# Altium PCB edison_breakout.PcbDoc (part 1 of 2)
Units mil, origin at the board's own origin, x right, y up, seen from the top; angles counter-clockwise.
Board outline 3250 x 2250 mil, 6 copper layers (Top Layer, Signal Layer 1, Signal Layer 3, Signal Layer 4, Signal Layer 2, Bottom Layer), stack 48.468 mil thick; 195 components, 178 nets, 869 pads, 172 vias.
Unrouted connection lines stored in the file: 453.
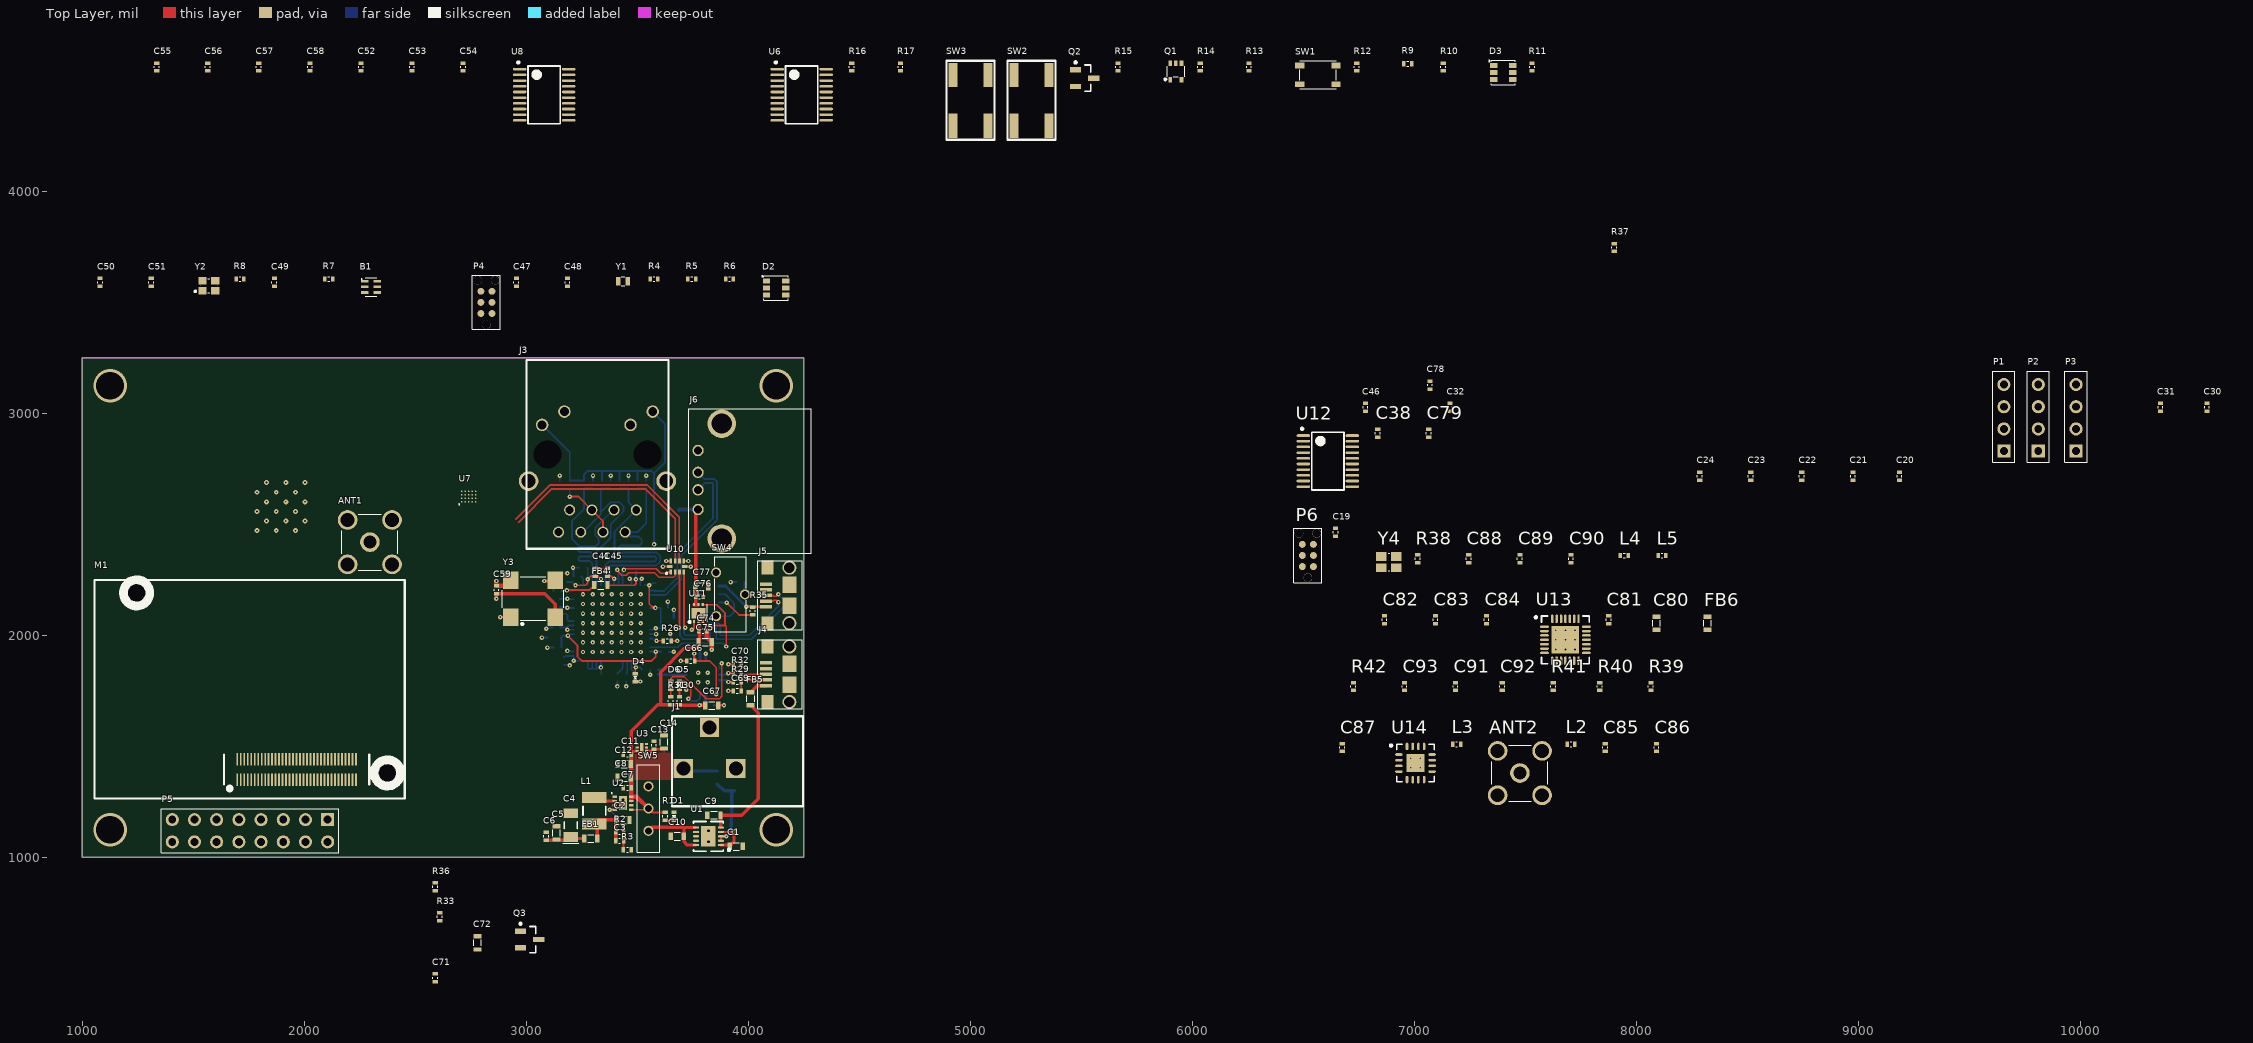
[diagram p0: Top Layer view]
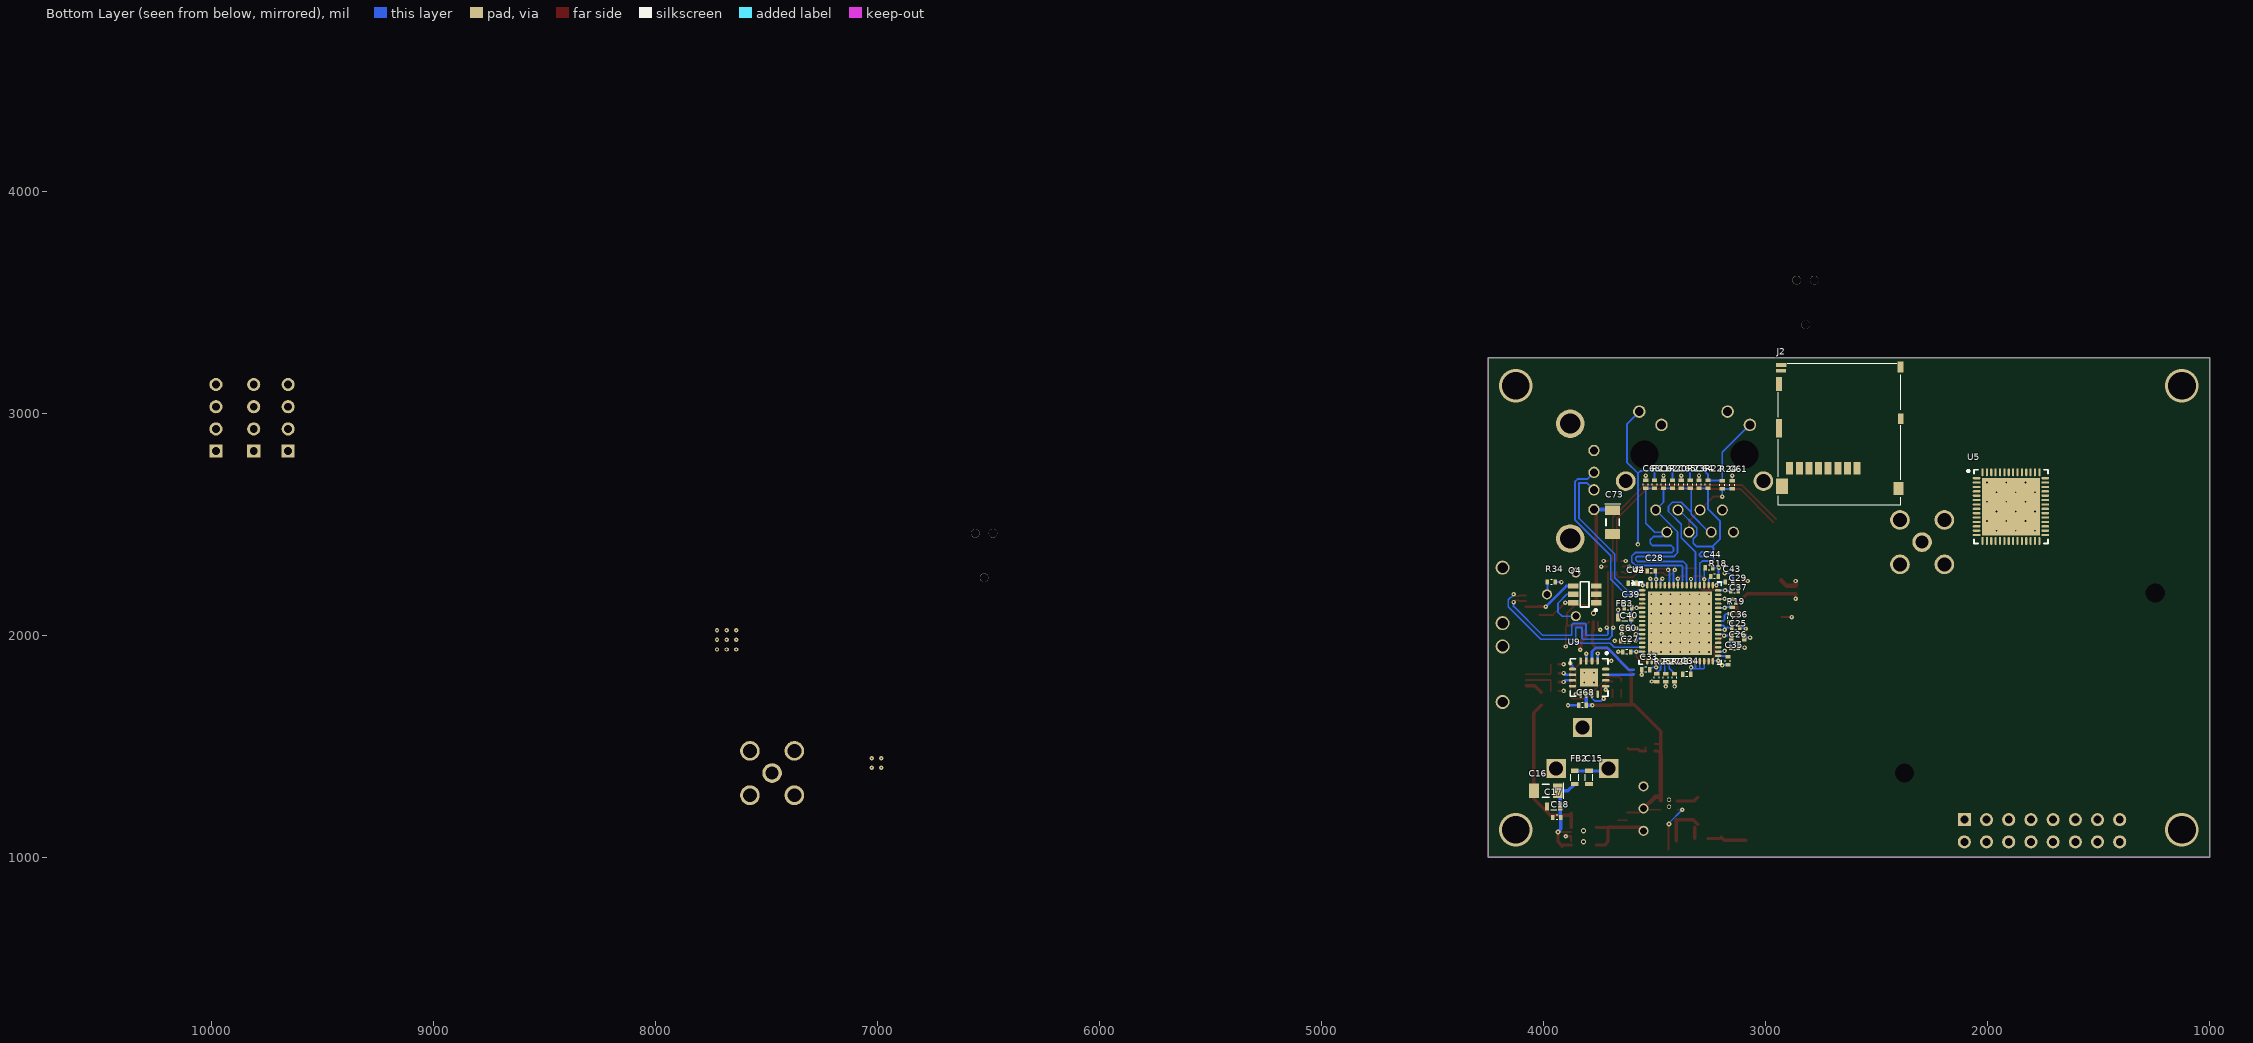
[diagram p1: Bottom Layer view, seen from below]
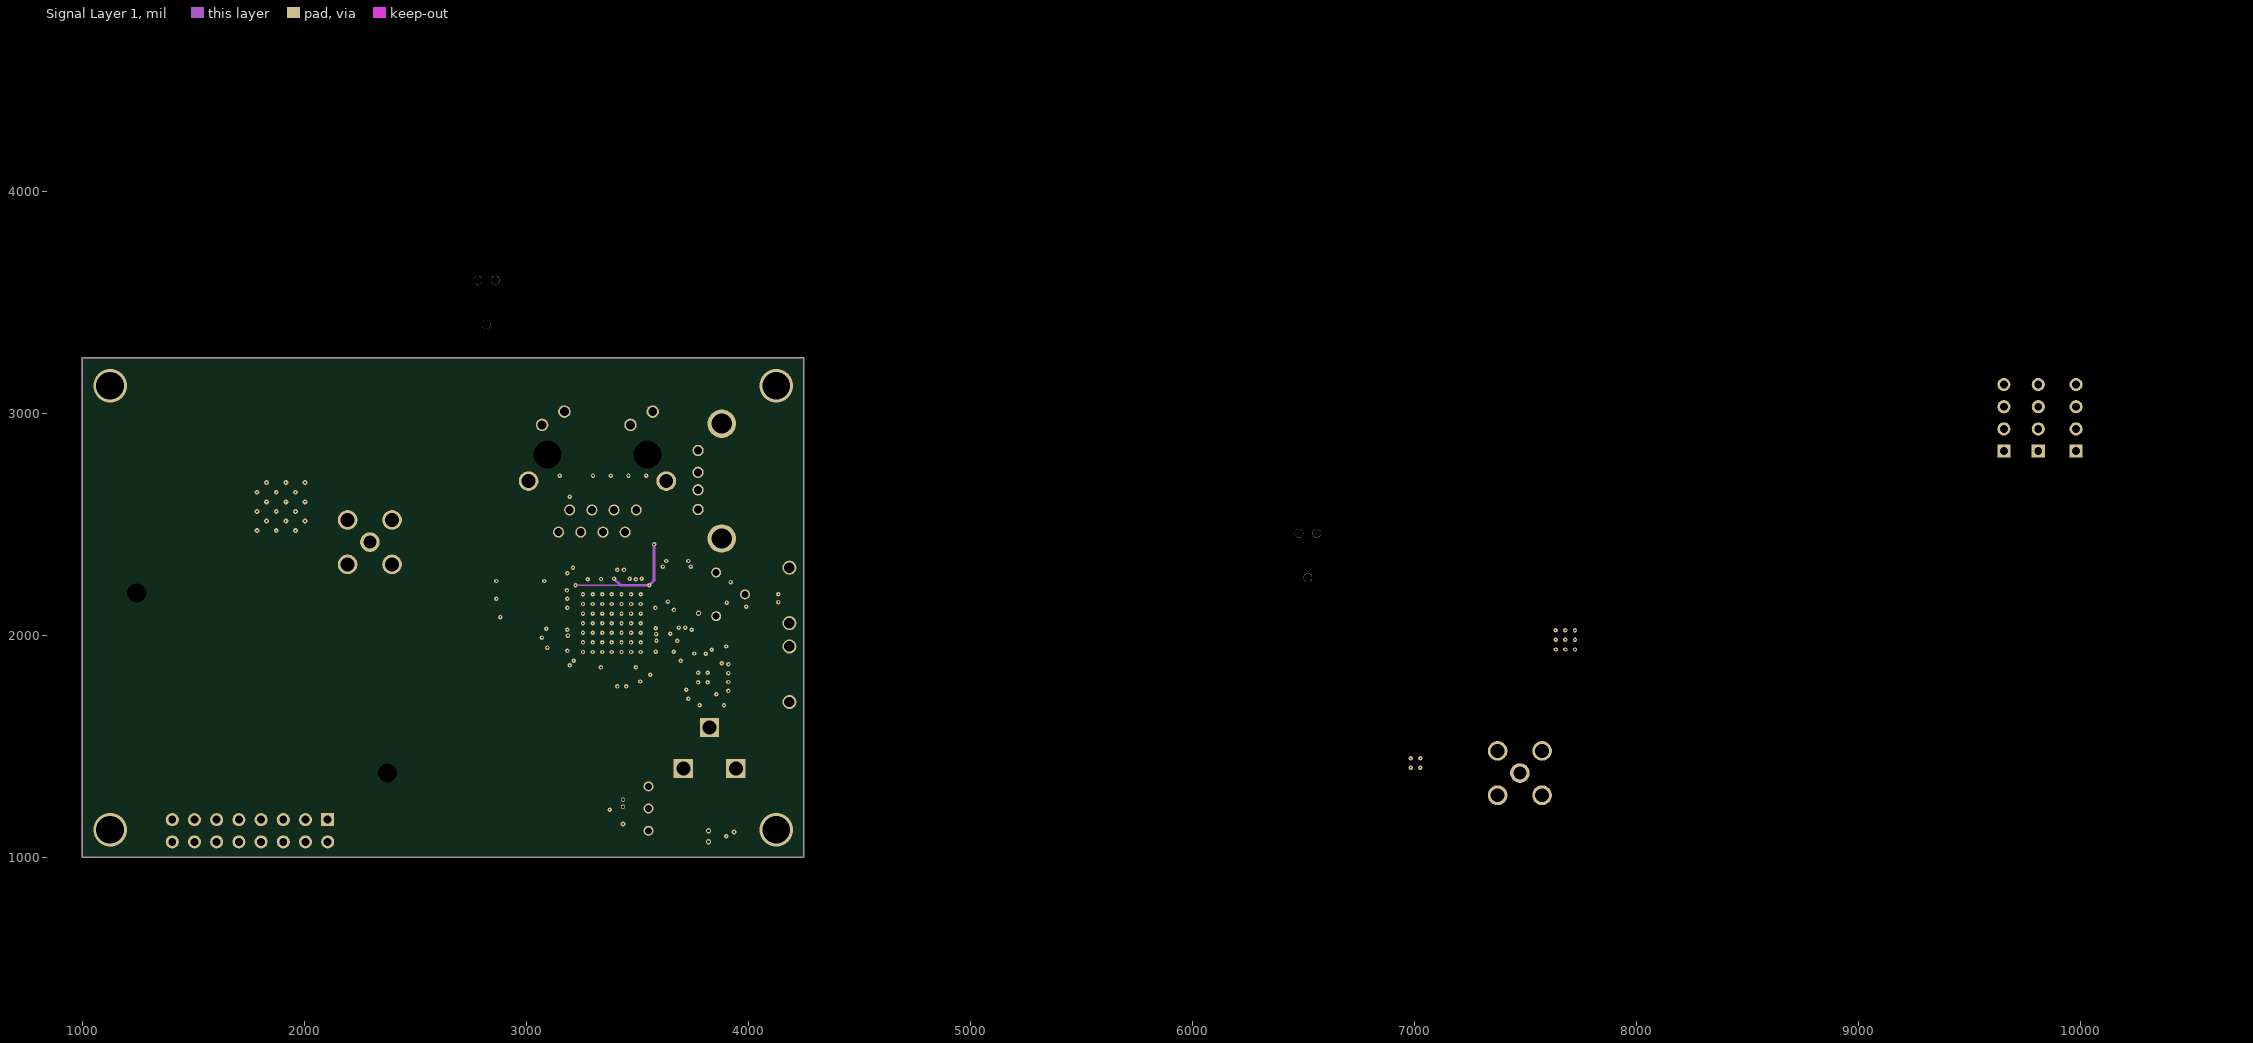
[diagram p2: Signal Layer 1]
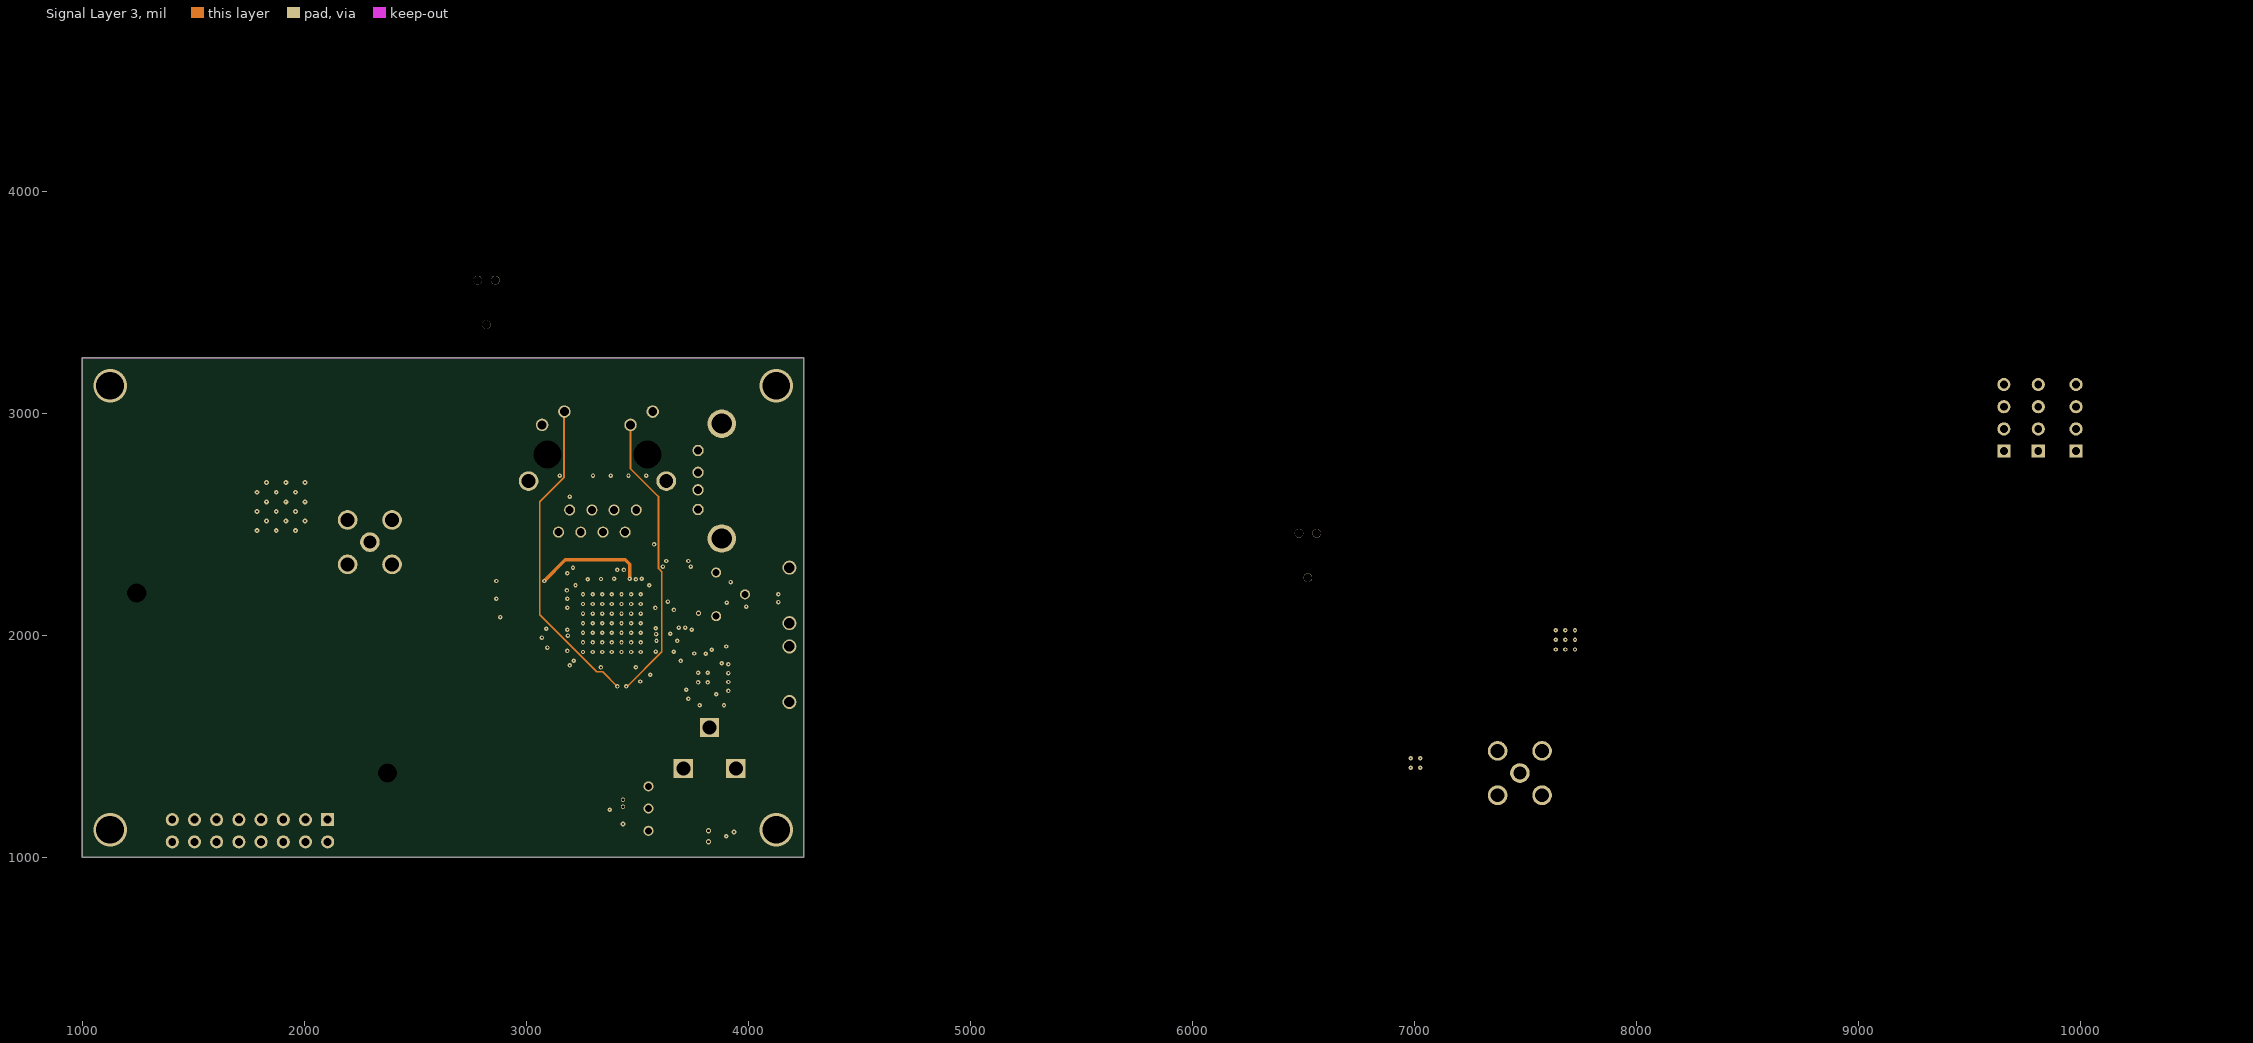
[diagram p3: Signal Layer 3]

## Layer stack, top to bottom
Top Solder: solder mask 0.4, Solder Resist, Dk 3.5
Top Layer: signal copper 1.4
Dielectric 1: core 10, FR-4, Dk 4.2
Signal Layer 1: signal copper 1.417
Dielectric 4: prepreg 5, Dk 4.2
Signal Layer 3: signal copper 1.417
Dielectric 5: core 10, Dk 4.2
Signal Layer 4: signal copper 1.417
Dielectric 3: prepreg 5, Dk 4.2
Signal Layer 2: signal copper 1.417
Dielectric 2: core 10, Dk 4.2
Bottom Layer: signal copper 1.4
Bottom Solder: solder mask 0.4, Solder Resist, Dk 3.5

## Board outline
1000,1000 1000,3250 4250,3250 4250,1000

## Design rules (kind name [scope] priority, off if disabled: settings)
Clearance "non plated holes" [InPadClass('NPHOLES')] p1: gap=10 // Sunstone Circuits Minimum Clearance Rule (MLB~4&6 Layer Designs)
Clearance "Clearance~Sunstone Circuits" [All] p2: gap=6 // Sunstone Circuits Minimum Clearance Rule (MLB~4&6 Layer Designs)
DiffPairsRouting [All] p1: maxlimit=10 minlimit=10 mostfreqgap=10 toplayer_minwidth=6 toplayer_maxwidth=15 toplayer_prefwidth=15 midlayer1_minwidth=6 midlayer1_maxwidth=15 midlayer1_prefwidth=15 midlayer2_minwidth=6 midlayer2_maxwidth=15 midlayer2_prefwidth=15 midlayer3_minwidth=15 midlayer3_maxwidth=15 midlayer3_prefwidth=15 midlayer4_minwidth=15 midlayer4_maxwidth=15 midlayer4_prefwidth=15 bottomlayer_minwidth=6 bottomlayer_maxwidth=15 bottomlayer_prefwidth=15 maxuncoupledlength=500
HoleSize "HoleSize~Sunstone Circuits" [All] p1: absolutevalues=TRUE maxlimit=251 minlimit=8 maxpercent=80.000 minpercent=20.000 // Sunstone Circuits Hole Size Rule (MLB~4&6 Layer Designs)
HoleSize Testpoint [All] p2: absolutevalues=TRUE maxlimit=100 minlimit=1 maxpercent=80.000 minpercent=20.000
HoleSize TestPointUsage [All] p3: absolutevalues=TRUE maxlimit=100 minlimit=1 maxpercent=80.000 minpercent=20.000
MatchedLengths [InNet(TX_N) and InNet(TX_P)] p1: tolerance=1000 checknetsindiffpair=TRUE checkdiffpairvsdiffpair=TRUE checkothers=TRUE
MinimumAnnularRing "MinimumAnnularRing~Sunstone Circuits" [All] p1 off: minimumring=7 // Sunstone Circuits Minimum Annular Ring (MLB~4&6 Layer Designs)
MinimumSolderMaskSliver [All] p1 off: minsoldermaskwidth=10
PlaneClearance "PlaneClearance~Sunstone Circuits" [All] p1: clearance=12 // Sunstone Circuits Power Plane Clearance Rule (MLB~4&6 Layer Designs)
PlaneConnect "PlaneConnect~Sunstone Circuits" [All] p1: planeconnectstyle=Relief reliefexpansion=10 reliefentries=4 reliefconductorwidth=8 reliefairgap=10 // Sunstone Circuits Power Plane Connect Rule (MLB~4&6 Layer Designs)
PolygonConnect "PolygonConnect~Sunstone Circuits" [All] p1: connectstyle=Relief reliefconductorwidth=8 reliefentries=4 polygonreliefangle="90 Angle" airgapwidth=10 // Sunstone Circuits Polygon Connect Style (MLB~4&6 Layer Designs)
RoomDefinition U_usb_uart [InComponentClass('U_usb_uart')] p1 off: confinementstyle=ConfineIn formatcopy=TRUE lockcomponents=FALSE outline 0,0 2000,0 2000,1000 0,1000
RoomDefinition U_usb_host_slave [InComponentClass('U_usb_host_slave')] p2 off: confinementstyle=ConfineIn formatcopy=TRUE lockcomponents=FALSE outline 0,0 2000,0 2000,1000 0,1000
RoomDefinition U_power [InComponentClass('U_power')] p3 off: confinementstyle=ConfineIn formatcopy=TRUE lockcomponents=FALSE outline 0,0 2000,0 2000,1000 0,1000
RoomDefinition U_ethernet [InComponentClass('U_ethernet')] p4 off: confinementstyle=ConfineIn formatcopy=TRUE lockcomponents=FALSE outline 0,0 2000,0 2000,1000 0,1000
RoomDefinition U_edison_misc [InComponentClass('U_edison_misc')] p5 off: confinementstyle=ConfineIn formatcopy=TRUE lockcomponents=FALSE outline 0,0 2000,0 2000,1000 0,1000
RoomDefinition U_edison_gpio [InComponentClass('U_edison_gpio')] p6 off: confinementstyle=ConfineIn formatcopy=TRUE lockcomponents=FALSE outline 0,0 2000,0 2000,1000 0,1000
RoomDefinition U_cc2538 [InComponentClass('U_cc2538')] p7 off: confinementstyle=ConfineIn formatcopy=TRUE lockcomponents=FALSE outline 0,0 2000,0 2000,1000 0,1000
RoomDefinition U_cc2520_cc2592 [InComponentClass('U_cc2520_cc2592')] p8 off: confinementstyle=ConfineIn formatcopy=TRUE lockcomponents=FALSE outline 0,0 2000,0 2000,1000 0,1000
RoutingVias "RoutingVias~Sunstone Circuits" [All] p1: holewidth=16 width=30 viastyle="Through Hole" minholewidth=6 minwidth=20 maxholewidth=20 maxwidth=40 // Sunstone Circuits Routing Vias Rule (MLB~4&6 Layer Designs)
ShortCircuit "ShortCircuit~Sunstone Circuits" [All] p1: allowed=FALSE // Sunstone Circuits Short Circuit Rule~Do Not Allow (MLB~4&6 Layer Designs)
SilkToSilkClearance [All] p1 off: silktosilkclearance=10
SilkToSolderMaskClearance [IsPad] p1 off: minsilkscreentomaskgap=10 clearancetoexposedcopper=TRUE
SolderMaskExpansion TentVias [isVia] p1: expansion=-20 // Sunstone Circuits Solder Mask Expansion Rule (MLB~4&6 Layer Designs)
SolderMaskExpansion "SolderMaskExpansion~Sunstone Circuits" [All] p2: expansion=3 // Sunstone Circuits Solder Mask Expansion Rule (MLB~4&6 Layer Designs)
ViasUnderSMD "ViasUnderSMD~Sunstone Circuits" [All] p1: allowed=FALSE // Sunstone Circuits Vias Under SMD~Do Not Allow (MLB~4&6 Layer Designs)
Width "Width~Sunstone Circuits" [All] p1: maxlimit=100 minlimit=6 preferedwidth=10 // Sunstone Circuits Minimum Width Rule (MLB~4&6 Layer Designs)
22 further rules are at their usual default settings.

## Classes and differential pairs
component class U_usb_uart: C66 C67 C68 C69 C70 D5 D6 FB5 J4 R29 R30 R31 R32 U9
component class U_usb_host_slave: C71 C72 C73 C74 C75 C76 C77 J5 J6 Q3 Q4 R33 R34 R35 R36 R37 SW4 U10 U11
component class U_power: C1 C2 C3 C4 C5 C6 C7 C8 C9 C10 C11 C12 C13 C14 C15 C16 C17 C18 C19 C20 C21 C22 C23 C24 C25 C26 C27 C28 C29 C30 C31 C32 C33 C34 C35 C36 C37 C39 C40 C41 C42 C43 C44 C45 C46 C78 D1 FB1 FB2 FB3 FB4 J1 L1 M1 P1 P2 P3 R1 R2 R3 SW5 U1 U2 U3 U5
component class U_ethernet: C59 C60 C61 C62 C63 C64 C65 D4 J3 R18 R19 R20 R21 R22 R23 R24 R25 R26 R27 R28 U4 Y3
component class U_edison_gpio: C38 C52 C53 C54 C55 C56 C57 C58 C79 D3 J2 P5 Q1 Q2 R9 R10 R12 R13 R14 R16 R17 SW2 SW3 U6 U7 U8 U12
component class U_cc2538: ANT1 B1 C47 C48 C49 C50 C51 D2 P4 P6 R4 R5 R6 R7 R8 Y1 Y2
component class U_cc2520_cc2592: ANT2 C80 C81 C82 C83 C84 C85 C86 C87 C88 C89 C90 C91 C92 C93 FB6 L2 L3 L4 L5 R38 R39 R40 R41 R42 U13 U14 Y4
component class U_edison_misc: R11 R15 SW1
differential pair USB_UPSTREAM: +USB_UPSTREAM_P -USB_UPSTREAM_N
differential pair USB_SLAVE: +USB_SLAVE_P -USB_SLAVE_N
differential pair USB_EDISON: +USB_EDISON_P -USB_EDISON_N
differential pair USB_DOWNSTREAM: +USB_DOWNSTREAM_P -USB_DOWNSTREAM_N
differential pair TX: +TX_P -TX_N
differential pair RX: +RX_P -RX_N
differential pair CC2538_RF: +CC2538_RF_P -CC2538_RF_N
differential pair CC2520_RF: +CC2520_RF_P -CC2520_RF_N

## Components (designator, comment, footprint, x,y, rotation, side; value= is the part's Value field where it differs from the comment)
ANT1 "5-1814832-1" 5-1814832-1 2295,2420 r0 top
ANT2 "5-1814832-1" 5-1814832-1 7475,1380 r0 top
B1 "2450BM15A0002E" 2450BM15A0002 2300,3570 r0 top
C1 "Ceramic capacitor" 0603 3945,1050 r0 top
C2 "Ceramic capacitor" 0603 3435,1169.25 r0 top
C3 "Ceramic capacitor" 0402 3420,1075 r0 top
C4 "Tantalum capacitor" "1206 - POLAR MARKING" 3200,1145 r90 top
C5 "Ceramic capacitor" 0603 3135,1110 r90 top
C6 "Ceramic capacitor" 0402 3090,1095 r90 top
C7 "Ceramic capacitor" 0402 3455,1314.25 r180 top
C8 "Ceramic capacitor" 0603 3440,1359.25 r180 top
C9 "Ceramic capacitor" 0603 3845,1190 r180 top
C10 "Ceramic capacitor" 0603 3680,1095 r180 top
C11 "Ceramic capacitor" 0402 3455,1465 r180 top
C12 "Ceramic capacitor" 0603 3440,1420 r180 top
C13 "Ceramic capacitor" 0402 3575,1505 r90 top
C14 "Ceramic capacitor" 0603 3620,1520 r90 top
C15 "Ceramic capacitor" 0603 3795,1360 r270 bottom
C16 "Tantalum capacitor" "1206 - POLAR MARKING" 3990,1300 r0 bottom
C17 "Ceramic capacitor" 0603 3955,1230 r0 bottom
C18 "Ceramic capacitor" 0402 3940,1180 r0 bottom
C19 "Ceramic capacitor" 0402 6645,2465 r90 top
C20 "Ceramic capacitor" 0402 9185,2717.28 r90 top
C21 "Ceramic capacitor" 0402 8975,2717.28 r90 top
C22 "Ceramic capacitor" 0402 8745,2717.28 r90 top
C23 "Ceramic capacitor" 0402 8515,2717.28 r90 top
C24 "Ceramic capacitor" 0402 8285,2717.28 r90 top
C25 "Ceramic capacitor" 0603 3125,1990 r180 bottom
C26 "Ceramic capacitor" 0402 3140,1945 r180 bottom
C27 "Ceramic capacitor" 0402 3625,1925 r0 bottom
C28 "Ceramic capacitor" 0402 3515,2290 r0 bottom
C29 "Ceramic capacitor" 0402 3140,2200 r180 bottom
C30 "Ceramic capacitor" 0402 10570,3027.28 r90 top
C31 "Ceramic capacitor" 0402 10360,3027.28 r90 top
C32 "Ceramic capacitor" 0402 7160,3027.28 r90 top
C33 "Ceramic capacitor" 0402 3540,1845 r0 bottom
C34 "Ceramic capacitor" 0402 3355,1825 r0 bottom
C35 "Ceramic capacitor" 0402 3170,1885 r270 bottom
C36 "Ceramic capacitor" 0402 3135,2035 r180 bottom
C37 "Ceramic capacitor" 0402 3150,2145 r270 bottom
C38 "Ceramic capacitor" 0402 6835,2910 r90 top
C39 "Ceramic capacitor" 0402 3620,2125 r0 bottom
C40 "Ceramic capacitor" 0402 3630,2030 r0 bottom
C41 "Ceramic capacitor" 0402 3310,2285 r90 top
C42 "Ceramic capacitor" 0402 3600,2235 r0 bottom
C43 "Ceramic capacitor" 0402 3165,2240 r180 bottom
C44 "Ceramic capacitor" 0402 3255,2305 r180 bottom
C45 "Ceramic capacitor" 0402 3365,2285 r90 top
C46 "Ceramic capacitor" 0402 6780,3027.28 r90 top
C47 "Ceramic capacitor" 0402 2955,3590 r90 top
C48 "Ceramic capacitor" 0402 3185,3590 r90 top
C49 "Ceramic capacitor" 0402 1865,3590 r90 top
C50 "Ceramic capacitor" 0402 1080,3590 r90 top
C51 "Ceramic capacitor" 0402 1310,3590 r90 top
C52 "Ceramic capacitor" 0402 2255,4560 r90 top
C53 "Ceramic capacitor" 0402 2485,4560 r90 top
C54 "Ceramic capacitor" 0402 2715,4560 r90 top
C55 "Ceramic capacitor" 0402 1335,4560 r90 top
C56 "Ceramic capacitor" 0402 1565,4560 r90 top
C57 "Ceramic capacitor" 0402 1795,4560 r90 top
C58 "Ceramic capacitor" 0402 2025,4560 r90 top
C59 "Ceramic capacitor" 0402 2865,2205 r270 top
C60 "Ceramic capacitor" 0402 3635,1975 r0 bottom
C61 "Ceramic capacitor" 0402 3150,2677.72 r90 bottom
C62 "Ceramic capacitor" 0402 3460,2680 r90 bottom
C63 "Ceramic capacitor" 0402 3540,2680 r90 bottom
C64 "Ceramic capacitor" 0402 3300,2680 r90 bottom
C65 "Ceramic capacitor" 0402 3380,2680 r90 bottom
C66 "Ceramic capacitor" 0402 3740,1885 r180 top
C67 "Ceramic capacitor" 0603 3835,1685 r0 top
C68 "Ceramic capacitor" 0402 3825,1685 r0 bottom
C69 "Ceramic capacitor" 0402 3950,1750 r180 top
C70 "Ceramic capacitor" 0402 3950,1870 r180 top
C71 "Ceramic capacitor" 0402 2590,457.28 r90 top
C72 "Ceramic capacitor" 0603 2780,615 r90 top
C73 "Tantalum capacitor" "1206 - POLAR MARKING" 3689,2510 r270 bottom
C74 "Ceramic capacitor" 0402 3795,2020 r0 top
C75 "Ceramic capacitor" 0603 3805,1970 r0 top
C76 "Ceramic capacitor" 0402 3780,2175 r0 top
C77 "Ceramic capacitor" 0603 3790,2220 r0 top
C78 "Ceramic capacitor" 0402 7070,3127.28 r90 top
C79 "Ceramic capacitor" 0402 7065,2910 r90 top
C80 "Ceramic capacitor" 0603 8090,2055 r90 top
C81 "Ceramic capacitor" 0402 7875,2070 r90 top
C82 "Ceramic capacitor" 0402 6865,2070 r90 top
C83 "Ceramic capacitor" 0402 7095,2070 r90 top
C84 "Ceramic capacitor" 0402 7325,2070 r90 top
C85 "Ceramic capacitor" 0402 7860,1495 r90 top
C86 "Ceramic capacitor" 0402 8090,1495 r90 top
C87 "Ceramic capacitor" 0402 6675,1495 r90 top
C88 "Ceramic capacitor" 0402 7245,2345 r90 top
C89 "Ceramic capacitor" 0402 7475,2345 r90 top
C90 "Ceramic capacitor" 0402 7705,2345 r90 top
C91 "Ceramic capacitor" 0402 7185,1770 r90 top
C92 "Ceramic capacitor" 0402 7395,1770 r90 top
C93 "Ceramic capacitor" 0402 6955,1770 r90 top
D1 "LED, Blue" "0402 - DIODE" 3665,1185 r90 top
D2 "CLY6D-FKC" PLCC6 4125,3565 r0 top
D3 "CLY6D-FKC" PLCC6 7400,4535 r0 top
D4 "LED, Orange" "0402 - DIODE" 3490,1810 r270 top
D5 "LED, Green" "0402 - DIODE" 3690,1775 r90 top
D6 "LED, Red" "0402 - DIODE" 3650,1775 r90 top
FB1 "Ferrite Bead" 0603 3290,1085 r0 top
FB2 "Ferrite Bead" 0603 3860,1360 r90 bottom
FB3 "Ferrite Bead" 0603 3635,2080 r0 bottom
FB4 "Ferrite Bead" 0603 3335.79,2226.26 r0 top
FB5 "Ferrite Bead" 0603 4010,1715 r90 top
FB6 "Ferrite Bead" 0603 8320,2055 r90 top
J1 "PJ-102AH" PJ-102AH 3825,1400 r270 top locked
J2 "2201778-1" 2201778-1 2740,2780 r180 bottom locked
J3 "J0011D01BNL" J0011D01BNL 3320,2815 r0 top locked
J4 "micro USB-B" "Micro USB-B" 4185,1825 r90 top locked
J5 "micro USB-B" "Micro USB-B" 4185,2180 r90 top locked
J6 "USB-A" 292303-2 3880,2695 r90 top locked
L1 "Chip inductor" 1210 3310,1210 r270 top
L2 "Chip inductor" 0402 7705,1510 r0 top
L3 "Chip inductor" 0402 7190,1510 r0 top
L4 "Chip inductor" 0402 7945,2360 r0 top
L5 "Chip inductor" 0402 8115,2360 r0 top
M1 "Intel Edison" "INTEL EDISON MATING" 1965,1395 r0 top
P1 "1 x 4 header" "1x4 header" 9655,2980 r90 top
P2 "1 x 4 header" "1x4 header" 9810,2980 r90 top
P3 "1 x 4 header" "1x4 header" 9980,2980 r90 top
P4 "TC2030" TC2030-IDC-NLFP 2820,3500 r90 top
P5 "2 x 8 header" "2x8 header" 1755,1120 r180 top
P6 "TC2030" TC2030-IDC-NLFP 6520,2360 r90 top
Q1 "DMN32D2LDF" SOT-353-5 5925,4540 r0 top
Q2 "Si2312CDS" SOT23-3 5515,4510 r0 top
Q3 "Si2312CDS" SOT23-3 3015,630 r0 top
Q4 "Si3865DDV" TSOT-23 3815,2185 r0 bottom
R1 "Chip resistor" 0402 3625,1185 r270 top
R2 "Chip resistor" 0402 3420,1115 r0 top
R3 "Chip resistor" 0402 3455,1035 r0 top
R4 "Chip resistor" 0402 3575,3605 r0 top
R5 "Chip resistor" 0402 3745,3605 r0 top
R6 "Chip resistor" 0402 3915,3605 r0 top
R7 "Chip resistor" 0402 2110,3605 r0 top
R8 "Chip resistor" 0402 1710,3605 r0 top
R9 "Chip resistor" 0402 6970,4575 r0 top
R10 "Chip resistor" 0402 7130,4560 r90 top
R11 "Chip resistor" 0402 7530,4560 r90 top
R12 "Chip resistor" 0402 6740,4560 r90 top
R13 "Chip resistor" 0402 6255,4560 r90 top
R14 "Chip resistor" 0402 6035,4560 r90 top
R15 "Chip resistor" 0402 5665,4560 r90 top
R16 "Chip resistor" 0402 4465,4560 r90 top
R17 "Chip resistor" 0402 4685,4560 r90 top
R18 "Chip resistor" 0402 3230,2265 r0 bottom
R19 "Chip resistor" 0402 3160,2080 r90 bottom
R20 "Chip resistor" 0402 3420,2680 r270 bottom
R21 "Chip resistor" 0402 3500,2680 r270 bottom
R22 "Chip resistor" 0402 3260,2680 r270 bottom
R23 "Chip resistor" 0402 3340,2680 r270 bottom
R24 "Chip resistor" 0402 3195,2677.72 r270 bottom
R25 "Chip resistor" 0402 3490,1810 r90 bottom
R26 "Chip resistor" 0402 3635,1975 r180 top
R27 "Chip resistor" 0402 3450,1810 r270 bottom
R28 "Chip resistor" 0402 3410,1810 r270 bottom
R29 "Chip resistor" 0402 3950,1790 r180 top
R30 "Chip resistor" 0402 3690,1705 r90 top
R31 "Chip resistor" 0402 3650,1705 r90 top
R32 "Chip resistor" 0402 3950,1830 r180 top
R33 "Chip resistor" 0402 2610,732.28 r90 top
R34 "Chip resistor" 0402 3965,2240 r180 bottom
R35 "Chip resistor" 0402 4020,2110 r90 top
R36 "Chip resistor" 0402 2590,867.28 r90 top
R37 "Chip resistor" 0402 7900,3747.28 r90 top
R38 "Chip resistor" 0402 7015,2345 r90 top
R39 "Chip resistor" 0402 8065,1770 r90 top
R40 "Chip resistor" 0402 7835,1770 r90 top
R41 "Chip resistor" 0402 7625,1770 r90 top
R42 "Chip resistor" 0402 6725,1770 r90 top
SW1 "PTS810" PTS810 6565,4525 r0 top
SW2 "KSC403J 50SH LFG" KSC403 5275,4410 r90 top
SW3 "KSC403J 50SH LFG" KSC403 5000,4410 r90 top
SW4 "CL-SB-12C" CL-SB-12C 3920,2185 r90 top
SW5 "450301014042" 450301014042 3550,1220 r270 top
U1 "LTC4413" DFN-10 3820,1095 r180 top
U2 "TPS62065" PWSON-8 3435,1244.25 r0 top
U3 "NCP176" XDFN6 3520,1495 r90 top
U4 "LAN9512" QFN-64 3385,2055 r180 bottom
U5 "CC2538" QFN56 1895,2580 r180 bottom
U6 "TXS0108E-Q1" TSSOP-20 4240,4435 r0 top
U7 "TXS0206A" BGA20C40P4X5_156X196X50 2740,2625 r90 top
U8 "TXS0108E-Q1" TSSOP-20 3080,4435 r0 top
U9 "IC_FT230XQ-R" QFN-16 3795,1810 r270 bottom
U10 "TS3USB221" PUQFN-10 3680,2310 r0 top
U11 "AP2151" U-DFN2018-6 3775,2100 r0 top
U12 "TXS0108E-Q1" TSSOP-20 6610,2785 r0 top
U13 "CC2520" QFN-28 7680,1980 r0 top
U14 "CC2592" QFN-16 7005,1425 r0 top
Y1 "ABS05" ABS05 3435,3595 r0 top
Y2 "FA-128" FA-128 1570,3575 r0 top
Y3 "CB3LV-5I-25M0000" CB3LV 3030,2165 r0 top
Y4 "NX2520SA-32.000000MHZ" NX2520SA 6885,2330 r0 top

## Footprints (in the part's own frame and the unit in brackets; to place one, negate y for a bottom-side part, rotate by r counter-clockwise, add the part's x,y. Pads: shape width x height; smd on the part's side, far side on the other; paste and mask are expansions set on the pad)
"1x4 header" [mm] "x4 header, 100 mils"
  rect 1.5x1.5 hole 0.9: 1(-3.81,0)
  round 1.5 hole 0.9: 2(-1.27,0) 3(1.27,0) 4(3.81,0)
  silkscreen extent -5.08,-1.27 5.33,1.27, body extent -5.07,-1.25 5.33,1.27, height 8.38
"2x8 header" [mm] "2x8 header, 100 mils"
  rect 1.5x1.5 hole 0.9: 1(-8.89,-1.27)
  round 1.5 hole 0.9: 2(-8.89,1.27) 3(-6.35,-1.27) 4(-6.35,1.27) 5(-3.81,-1.27) 6(-3.81,1.27) 7(-1.27,-1.27) 8(-1.27,1.27) 9(1.27,-1.27) 10(1.27,1.27) 11(3.81,-1.27) 12(3.81,1.27) 13(6.35,-1.27) 14(6.35,1.27) 15(8.89,-1.27) 16(8.89,1.27)
  silkscreen extent -10.16,-2.54 10.16,2.54, body extent -10.16,-2.54 10.16,2.54, height 8.38
5-1814832-1 [mm] "SMA connector, through hole, 50 Ohm, 3Ghz"
  round 2.25 hole 1.6: 1(-2.54,-2.54) 1(-2.54,2.54) 1(2.54,-2.54) 1(2.54,2.54)
  round 2.25 hole 1.5: 2(0,0)
  silkscreen extent -3.2,-3.2 3.2,3.2, body extent -3.2,-3.2 3.2,3.2, height 9.5
0402 [mm] "2-Leads, Body 1.00x0.50mm, IPC Medium Density"
  rect 0.4x0.6 smd: 1(-0.45,0) 2(0.45,0)
  silkscreen extent -0.1,-0.28 0.1,0.28, body extent -0.53,-0.28 0.53,0.27, height 0.4
"0402 - DIODE" [mm] "2-Leads, Body 1.00x0.50mm, IPC Medium Density"
  rect 0.4x0.6 smd: 1(-0.45,0) 2(0.45,0)
  silkscreen extent -0.13,-0.18 0.13,0.18, body extent -0.53,-0.28 0.53,0.27, height 0.4
0603 [mm] "2-Leads, Body 1.55x0.85mm, IPC Medium Density"
  rect 0.5x0.9 smd: 1(-0.75,0) 2(0.75,0)
  silkscreen extent -0.35,-0.45 0.35,0.43, body extent -0.75,-0.42 0.75,0.43, height 0.5
"1206 - POLAR MARKING" [mm]
  rect 1.1x1.7 smd: 1(-1.35,0) 2(1.35,0)
  silkscreen extent -2.07,-0.9 0.4,0.91, body extent -1.7,-0.9 1.7,0.9, height 1.3
1210 [mm]
  rect 1.25x2.8 smd: 1(1.525,-0.102) 2(-1.525,-0.102)
  silkscreen extent -0.5,-1.4 0.5,1.2, body extent -1.8,-1.5 1.8,1.3, height 2.8
2450BM15A0002 [mm] "Chip Array, Flat, 6-Leads, Pitch 0.65mm,  Body 2.00x1.25mm,  IPC Medium Density"
  rect 0.85x0.3 smd: 1(-0.7,0.65) 2(-0.7,0) 3(-0.7,-0.65) 4(0.7,-0.65) 5(0.7,0) 6(0.7,0.65)
  silkscreen extent -1.11,-1.05 0.65,1.05, body extent -0.67,-1.05 0.67,1.05, height 0.81
292303-2 [mm] "USB 2.0 Type A, 4 position receptacle"
  round 1.3 hole 0.92: 1(-3.25,2.71) 2(-1,2.71) 3(1,2.71) 4(3.5,2.71)
  round 3.25 hole 2.3: 5(-6.57,0) 6(6.57,0)
  silkscreen extent -8.25,-10.25 8.25,3.75, body extent -8.12,-10.25 8.12,3.75, height 7.12
2201778-1 [mm] "Micro SD Slot"
  rect 0.8x1.4 smd: 1(3.85,-0.7) 2(2.75,-0.7) 3(1.65,-0.7) 4(0.55,-0.7) 5(-0.55,-0.7) 6(-1.65,-0.7) 7(-2.75,-0.7) 8(-3.85,-0.7)
  rect 1.15x0.45 smd: 9(-4.815,11.125)
  rect 1.1x0.45 smd: 10(-4.84,10.465)
  rect 1.35x1.8 smd: 11(-4.74,-2.75)
  rect 0.65x2.14 smd: 12(-5.065,3.88)
  rect 0.65x1.6 smd: 13(-5.065,8.96)
  rect 0.65x1.3 smd: 14(8.835,10.9)
  rect 0.6x1.15 smd: 15(8.86,4.975)
  rect 1.16x1.5 smd: 16(8.58,-3)
  silkscreen extent -5.18,-4.95 8.86,11.25, body extent -5.17,-4.95 8.86,11.25, height 1.85
450301014042 [mm] "SPDT switch"
  round 1.15 hole 0.8: 1(0,0) 2(-2.54,0) 3(2.54,0)
  silkscreen extent -5,-1.3 5,1.3, body extent -5,-1.25 5,1.25, height 6.4
ABS05 [mm] "ABS05 Crystal"
  rect 0.5x1 smd: 1(-0.55,0) 2(0.55,0)
  silkscreen extent -0.2,-0.5 0.2,0.5, body extent -0.8,-0.5 0.8,0.5, height 0.5
BGA20C40P4X5_156X196X50 [mm] "BGA, 20-Leads, Body 1.56x1.96mmx0.50mm, Pitch 0.40mm"
  round 0.17 smd: A1(-0.6,0.8) A2(-0.2,0.8) A3(0.2,0.8) A4(0.6,0.8) B1(-0.6,0.4) B2(-0.2,0.4) B3(0.2,0.4) B4(0.6,0.4) C1(-0.6,0) C2(-0.2,0) C3(0.2,0) C4(0.6,0) D1(-0.6,-0.4) D2(-0.2,-0.4) D3(0.2,-0.4) D4(0.6,-0.4) E1(-0.6,-0.8) E2(-0.2,-0.8) E3(0.2,-0.8) E4(0.6,-0.8)
  silkscreen extent -0.93,1.04 -0.84,1.13, body extent -0.78,-0.98 0.78,0.98, height 0.5
CB3LV [mm] "CTS CB3LV Oscillator"
  rect 1.8x2 smd: 1(-2.54,-2.1) 2(2.54,-2.1) 3(2.54,2.1) 4(-2.54,2.1)
  silkscreen extent -3.52,-2.99 3.5,2.5, body extent -3.5,-2.5 3.5,2.5, height 1.8
CL-SB-12C [mm] "SPST Slide though hole slide switch"
  round 1.15 hole 0.8: 1(-2.5,1.65) 2(2.5,1.65) C(0,-1.65)
  silkscreen extent -4.3,-1.8 4.3,1.8, body extent -4.3,-1.8 4.3,1.8, height 5.5
DFN-10 [mm] "QFN, 10-Leads, Body 3.00x3.00mm, Pitch 0.50mm, Thermal Pad 1.65x2.38mm, IPC Medium Density"
  oval 0.7x0.25 smd: 1(-1.425,1) 2(-1.425,0.5) 3(-1.425,0) 4(-1.425,-0.5) 5(-1.425,-1) 6(1.425,-1) 7(1.425,-0.5) 8(1.425,0) 9(1.425,0.5) 10(1.425,1)
  rect 1.65x2.38 smd: 11(0,0)
  silkscreen extent -2.48,-1.7 1.7,1.7, body extent -1.55,-1.55 1.55,1.55, height 0.75
FA-128 [mm] "Seiko Epson FA-128 Crystal"
  rect 0.95x0.85 smd: 1(-0.725,-0.575) 2(0.725,-0.575) 3(0.725,0.575) 4(-0.725,0.575)
  silkscreen extent -1.63,-0.8 1,0.8, body extent -1,-0.8 1,0.8, height 0.5
"INTEL EDISON MATING" [mm] "DF40 Series 0.4 mm Pitch, 3.0 Height, Board-to-Board connectors"
  rect 0.2x1.43 smd: 1(-6.8,-1.175) 2(-6.8,1.175) 3(-6.4,-1.175) 4(-6.4,1.175) 5(-6,-1.175) 6(-6,1.175) 7(-5.6,-1.175) 8(-5.6,1.175) 9(-5.2,-1.175) 10(-5.2,1.175) 11(-4.8,-1.175) 12(-4.8,1.175) 13(-4.4,-1.175) 14(-4.4,1.175) 15(-4,-1.175) 16(-4,1.175) 17(-3.6,-1.175) 18(-3.6,1.175) 19(-3.2,-1.175) 20(-3.2,1.175) 21(-2.8,-1.175) 22(-2.8,1.175) 23(-2.4,-1.175) 24(-2.4,1.175) 25(-2,-1.175) 26(-2,1.175) 27(-1.6,-1.175) 28(-1.6,1.175) 29(-1.2,-1.175) 30(-1.2,1.175) 31(-0.8,-1.175) 32(-0.8,1.175) 33(-0.4,-1.175) 34(-0.4,1.175) 35(0,-1.175) 36(0,1.175) 37(0.4,-1.175) 38(0.4,1.175) 39(0.8,-1.175) 40(0.8,1.175) 41(1.2,-1.175) 42(1.2,1.175) 43(1.6,-1.175) 44(1.6,1.175) 45(2,-1.175) 46(2,1.175) 47(2.4,-1.175) 48(2.4,1.175) 49(2.8,-1.175) 50(2.8,1.175) 51(3.2,-1.175) 52(3.2,1.175) 53(3.6,-1.175) 54(3.6,1.175) 55(4,-1.175) 56(4,1.175) 57(4.4,-1.175) 58(4.4,1.175) 59(4.8,-1.175) 60(4.8,1.175) 61(5.2,-1.175) 62(5.2,1.175) 63(5.6,-1.175) 64(5.6,1.175) 65(6,-1.175) 66(6,1.175) 67(6.4,-1.175) 68(6.4,1.175) 69(6.8,-1.175) 70(6.8,1.175)
  round 0 hole 2.2: ""(-18.3,20.23) ""(10.39,-0.37)
  silkscreen extent -23.13,-3.3 12.37,21.73, body extent -23.13,-3.38 12.43,21.7, height 5.31
J0011D01BNL [mm] "Pulse Electronic RJ45 Jack"
  round 1.26 hole 0.9: 1(4.445,-6.35) 2(3.175,-8.89) 3(1.905,-6.35) 4(0.635,-8.89) 5(-0.635,-6.35) 6(-1.905,-8.89) 7(-3.175,-6.35) 8(-4.445,-8.89)
  round 1.43 hole 1.02: 9(6.325,4.9) 10(3.785,3.38) 11(-3.785,4.9) 12(-6.325,3.38)
  round 2.25 hole 1.6: 13(7.875,-3.05) 14(-7.875,-3.05)
  round 0 hole 3.2: ""(-5.715,0) ""(5.715,0)
  silkscreen extent -8.13,-10.8 8.13,10.79, body extent -8.32,-10.55 8.28,10.8, height 13.57
KSC403 [mm] "KSC403 Series switch"
  rect 2.8x1 smd: 1(-2.9,2) 2(-2.9,-2) 3(2.9,2) 4(2.9,-2)
  silkscreen extent -4.5,-2.75 4.52,2.75, body extent -2.73,-2.5 2.75,2.5, height 6
"Micro USB-B" [mm]
  rect 0.4x1.35 smd mask+0.1: 1(-1.3,2.675) 2(-0.65,2.675) 3(0,2.675) 4(0.65,2.675) 5(1.3,2.675)
  rect 1.6x1.4 smd mask+0.1: 6(-3.2,2.5) 6(3.2,2.5)
  round 1.6 hole 1.2: 6(-3.175,0) 6(3.175,0)
  rect 1.9x1.6 smd mask+0.1: 6(-1.2,0) 6(1.2,0)
  silkscreen extent -3.95,-1.45 3.95,3.6, body extent -4.1,-2.54 4.1,2.89, height 2.68
NX2520SA [mm] "NDK Crystal"
  rect 1.2x1 smd: 1(-0.85,-0.65) 2(0.85,-0.65) 3(0.85,0.65) 4(-0.85,0.65)
  silkscreen extent -0.1,-1 0.1,1, body extent -1.3,-1 1.3,1, height 0.65
PJ-102AH [mm] "Power Jack"
  rect 2.2x2.2 hole 1.6: 1(0,-3) 2(0,3) 3(-4.7,0)
  silkscreen extent -6,-4.3 4.3,10.7, body extent -5.75,-3.99 4.08,10.89, height 10
PLCC6 [mm] "CREE PLCC6 LED"
  rect 0.85x0.55 smd: 1(-1.1,0.8) 2(-1.1,0) 3(-1.1,-0.8) 4(1.1,-0.8) 5(1.1,0) 6(1.1,0.8)
  silkscreen extent -1.67,-1.4 1.4,1.4
PTS810 [mm] "C & K PTS 810 Microminiature SMT"
  rect 1.05x0.65 smd: 1(-2.075,1.075) 2(2.075,1.075) 3(-2.075,-1.075) 4(2.075,-1.075)
  silkscreen extent -2.1,-1.6 2.1,1.6, body extent -2.1,-1.6 2.1,1.6, height 4.1
PUQFN-10 [mm]
  rect 0.3x0.58 smd: 1(-0.75,-0.635) 2(-0.25,-0.635) 3(0.25,-0.635) 4(0.75,-0.635) 6(0.75,0.635) 7(0.25,0.635) 8(-0.25,0.635) 9(-0.75,0.635)
  rect 0.63x0.35 smd: 5(0.86,0) 10(-0.86,0)
  silkscreen extent -1.28,-0.83 -1.17,-0.72, body extent -1,-0.75 1,0.75, height 0.6
PWSON-8 [mm] "PSON, 8-Leads, Body 2.00x2.00mm, Pitch 0.50mm, Thermal Pad 1.60x0.82mm, IPC Medium Density"
  rect 0.5x0.28 smd: 1(-0.95,0.75) 2(-0.95,0.25) 3(-0.95,-0.25) 4(-0.95,-0.75) 5(0.95,-0.75) 6(0.95,-0.25) 7(0.95,0.25) 8(0.95,0.75)
  round 0.5 hole 0.3: 9(0,-0.4) 9(0,0.4)
  rect 0.9x1.6 smd: 9(0,0)
  silkscreen extent -1.32,1.09 -1.22,1.19, body extent -1.05,-1.05 1.05,1.05, height 0.8
QFN56 [mm] "QFN, 56-Leads, Body 8.00x8.00mm, Pitch 0.50mm, Thermal Pad 6.60x6.60mm, IPC Medium Density"
  oval 0.9x0.25 smd: 1(-3.925,3.25) 2(-3.925,2.75) 3(-3.925,2.25) 4(-3.925,1.75) 5(-3.925,1.25) 6(-3.925,0.75) 7(-3.925,0.25) 8(-3.925,-0.25) 9(-3.925,-0.75) 10(-3.925,-1.25) 11(-3.925,-1.75) 12(-3.925,-2.25) 13(-3.925,-2.75) 14(-3.925,-3.25) 29(3.925,-3.25) 30(3.925,-2.75) 31(3.925,-2.25) 32(3.925,-1.75) 33(3.925,-1.25) 34(3.925,-0.75) 35(3.925,-0.25) 36(3.925,0.25) 37(3.925,0.75) 38(3.925,1.25) 39(3.925,1.75) 40(3.925,2.25) 41(3.925,2.75) 42(3.925,3.25)
  oval 0.25x0.9 smd: 15(-3.25,-3.925) 16(-2.75,-3.925) 17(-2.25,-3.925) 18(-1.75,-3.925) 19(-1.25,-3.925) 20(-0.75,-3.925) 21(-0.25,-3.925) 22(0.25,-3.925) 23(0.75,-3.925) 24(1.25,-3.925) 25(1.75,-3.925) 26(2.25,-3.925) 27(2.75,-3.925) 28(3.25,-3.925) 43(3.25,3.925) 44(2.75,3.925) 45(2.25,3.925) 46(1.75,3.925) 47(1.25,3.925) 48(0.75,3.925) 49(0.25,3.925) 50(-0.25,3.925) 51(-0.75,3.925) 52(-1.25,3.925) 53(-1.75,3.925) 54(-2.25,3.925) 55(-2.75,3.925) 56(-3.25,3.925)
  rect 6.6x6.6 smd: 57(0,0)
  silkscreen extent -5,-4.22 4.22,4.23, body extent -4.08,-4.07 4.07,4.08, height 1
QFN-16 [mm] "QFN, 16-Leads, Body 4.00x4.00mm, Pitch 0.65mm, Thermal Pad 2.08x2.08mm, IPC Medium Density"
  oval 0.85x0.3 smd: 1(-1.9,0.975) 2(-1.9,0.325) 3(-1.9,-0.325) 4(-1.9,-0.975) 9(1.9,-0.975) 10(1.9,-0.325) 11(1.9,0.325) 12(1.9,0.975)
  oval 0.3x0.85 smd: 5(-0.975,-1.9) 6(-0.325,-1.9) 7(0.325,-1.9) 8(0.975,-1.9) 13(0.975,1.9) 14(0.325,1.9) 15(-0.325,1.9) 16(-0.975,1.9)
  rect 2.08x2.08 smd: 17(0,0)
  silkscreen extent -2.92,-2.15 2.15,2.15, body extent -2,-2 2,2, height 0.8
QFN-28 [mm] "QFN, 28-Leads, Body 5.00x5.00mm, Pitch 0.50mm, Thermal Pad 3.15x3.15mm, IPC Medium Density"
  oval 1x0.28 smd: 1(-2.4,1.5) 2(-2.4,1) 3(-2.4,0.5) 4(-2.4,0) 5(-2.4,-0.5) 6(-2.4,-1) 7(-2.4,-1.5) 15(2.4,-1.5) 16(2.4,-1) 17(2.4,-0.5) 18(2.4,0) 19(2.4,0.5) 20(2.4,1) 21(2.4,1.5)
  oval 0.28x1 smd: 8(-1.5,-2.4) 9(-1,-2.4) 10(-0.5,-2.4) 11(0,-2.4) 12(0.5,-2.4) 13(1,-2.4) 14(1.5,-2.4) 22(1.5,2.4) 23(1,2.4) 24(0.5,2.4) 25(0,2.4) 26(-0.5,2.4) 27(-1,2.4) 28(-1.5,2.4)
  rect 3.15x3.15 smd: 29(0,0)
  silkscreen extent -3.5,-2.73 2.73,2.72, body extent -2.57,-2.58 2.58,2.57, height 1
QFN-64 [mm] "QFN, 64-Leads, Body 9.00x9.00mm, Pitch 0.50mm, Thermal Pad 7.30x7.30mm, IPC Medium Density"
  oval 0.75x0.28 smd: 1(-4.35,3.75) 2(-4.35,3.25) 3(-4.35,2.75) 4(-4.35,2.25) 5(-4.35,1.75) 6(-4.35,1.25) 7(-4.35,0.75) 8(-4.35,0.25) 9(-4.35,-0.25) 10(-4.35,-0.75) 11(-4.35,-1.25) 12(-4.35,-1.75) 13(-4.35,-2.25) 14(-4.35,-2.75) 15(-4.35,-3.25) 16(-4.35,-3.75) 33(4.35,-3.75) 34(4.35,-3.25) 35(4.35,-2.75) 36(4.35,-2.25) 37(4.35,-1.75) 38(4.35,-1.25) 39(4.35,-0.75) 40(4.35,-0.25) 41(4.35,0.25) 42(4.35,0.75) 43(4.35,1.25) 44(4.35,1.75) 45(4.35,2.25) 46(4.35,2.75) 47(4.35,3.25) 48(4.35,3.75)
  oval 0.28x0.75 smd: 17(-3.75,-4.35) 18(-3.25,-4.35) 19(-2.75,-4.35) 20(-2.25,-4.35) 21(-1.75,-4.35) 22(-1.25,-4.35) 23(-0.75,-4.35) 24(-0.25,-4.35) 25(0.25,-4.35) 26(0.75,-4.35) 27(1.25,-4.35) 28(1.75,-4.35) 29(2.25,-4.35) 30(2.75,-4.35) 31(3.25,-4.35) 32(3.75,-4.35) 49(3.75,4.35) 50(3.25,4.35) 51(2.75,4.35) 52(2.25,4.35) 53(1.75,4.35) 54(1.25,4.35) 55(0.75,4.35) 56(0.25,4.35) 57(-0.25,4.35) 58(-0.75,4.35) 59(-1.25,4.35) 60(-1.75,4.35) 61(-2.25,4.35) 62(-2.75,4.35) 63(-3.25,4.35) 64(-3.75,4.35)
  rect 7.3x7.3 smd: 65(0,0)
  silkscreen extent -5.48,-4.7 4.7,4.7, body extent -4.55,-4.55 4.55,4.55, height 1
SOT23-3 [mm] "SOT23, 3-Leads, Body 2.9x1.3mm, Pitch 0.95mm, Lead Span 2.3mm, IPC Medium Density"
  rect 1.3x0.6 smd: 1(-1.05,0.95) 2(-1.05,-0.95) 3(1.05,0)
  silkscreen extent -1.17,-1.5 0.7,1.92, body extent -0.7,-1.5 0.7,1.5, height 1.2
SOT-353-5 [mm]
  rect 0.42x0.6 smd: 1(-0.65,-0.95) 2(0.65,-0.95) 3(0.65,0.95) 4(0,0.95) 5(-0.65,0.95)
  silkscreen extent -1.3,-1 1,0.6, body extent -1,-0.6 1,0.6, height 1
TC2030-IDC-NLFP [mil]
  round 39 hole 39 unplated: 0(-100,0) 0(100,-40) 0(100,40)
  round 31 smd paste-196.85: 1(-50,-25) 2(-50,25) 3(0,-25) 4(0,25) 5(50,-25) 6(50,25)
  Top Layer pour cut-out: -50,25 -50,-25 50,-25 50,25
  silkscreen extent -122,-63 122,63
TSOT-23 [mm] "SOT23, 6-Leads, Body 2.90x2.45mm, Pitch 0.95mm, IPC Medium Density"
  rect 1.22x0.62 smd: 1(-1.31,0.95) 2(-1.31,0) 3(-1.31,-0.95) 4(1.31,-0.95) 5(1.31,0) 6(1.31,0.95)
  silkscreen extent -1.4,-1.45 0.5,1.92, body extent -0.88,-1.45 0.87,1.45, height 1
TSSOP-20 [mm] "TSOP, 20-Leads, Body 6.50x4.40mm, Pitch 0.65mm, IPC Medium Density"
  oval 1.55x0.3 smd: 1(-2.8,2.925) 2(-2.8,2.275) 3(-2.8,1.625) 4(-2.8,0.975) 5(-2.8,0.325) 6(-2.8,-0.325) 7(-2.8,-0.975) 8(-2.8,-1.625) 9(-2.8,-2.275) 10(-2.8,-2.925) 11(2.8,-2.925) 12(2.8,-2.275) 13(2.8,-1.625) 14(2.8,-0.975) 15(2.8,-0.325) 16(2.8,0.325) 17(2.8,0.975) 18(2.8,1.625) 19(2.8,2.275) 20(2.8,2.925)
  silkscreen extent -3.07,-3.3 1.85,3.82, body extent -2.25,-3.3 2.25,3.3, height 1.2
U-DFN2018-6 [mm]
  rect 0.25x0.35 smd: 1(-0.5,-0.975) 2(0,-0.975) 3(0.5,-0.975) 4(0.5,0.975) 5(0,0.975) 6(-0.5,0.975)
  rect 1.6x1.2 smd: 7(0,0)
  silkscreen extent -1.1,-1.1 1,1, body extent -1,-1 1,1, height 0.6
XDFN6 [mm]
  rect 0.24x0.35 smd: 1(-0.4,-0.525) 2(0,-0.525) 3(0.4,-0.525) 4(0.4,0.525) 5(0,0.525) 6(-0.4,0.525)
  rect 1.08x0.4 smd: 7(0,0)
  silkscreen extent -0.76,-0.59 -0.69,-0.51, body extent -0.6,-0.6 0.6,0.6, height 0.45